# Altium PCB Nav_PCB2.PcbDoc (part 1 of 2)
Units mil, origin at the board's own origin, x right, y up, seen from the top; angles counter-clockwise.
Board outline 7310 x 3950 mil, 2 copper layers (Top Layer, Bottom Layer); 182 components, 113 nets, 524 pads, 79 vias.
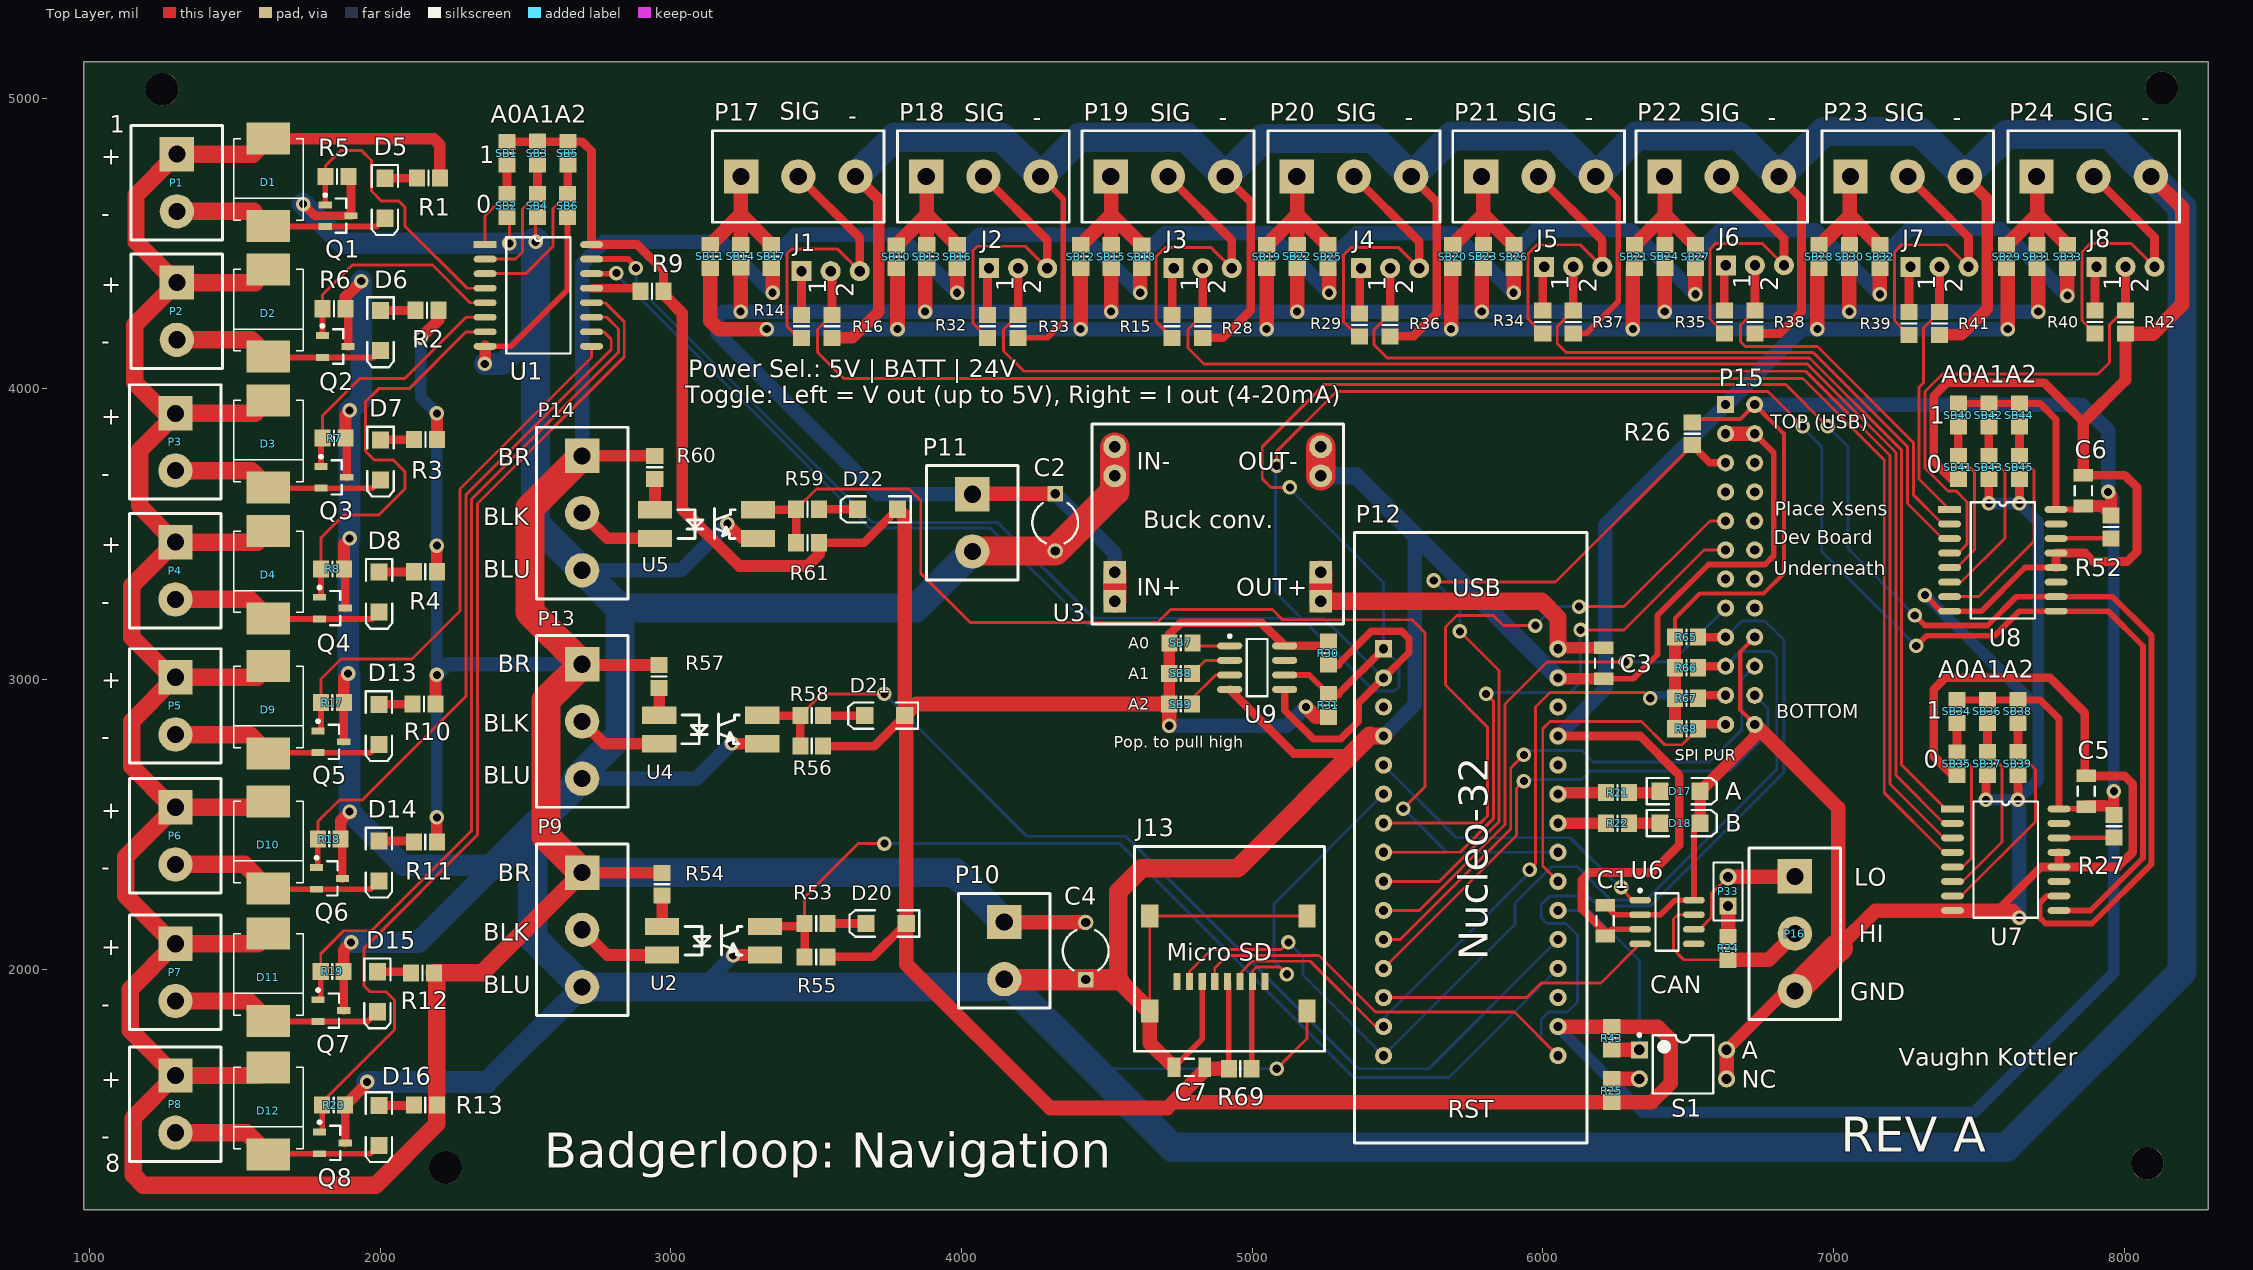
[diagram p0: Top Layer view]
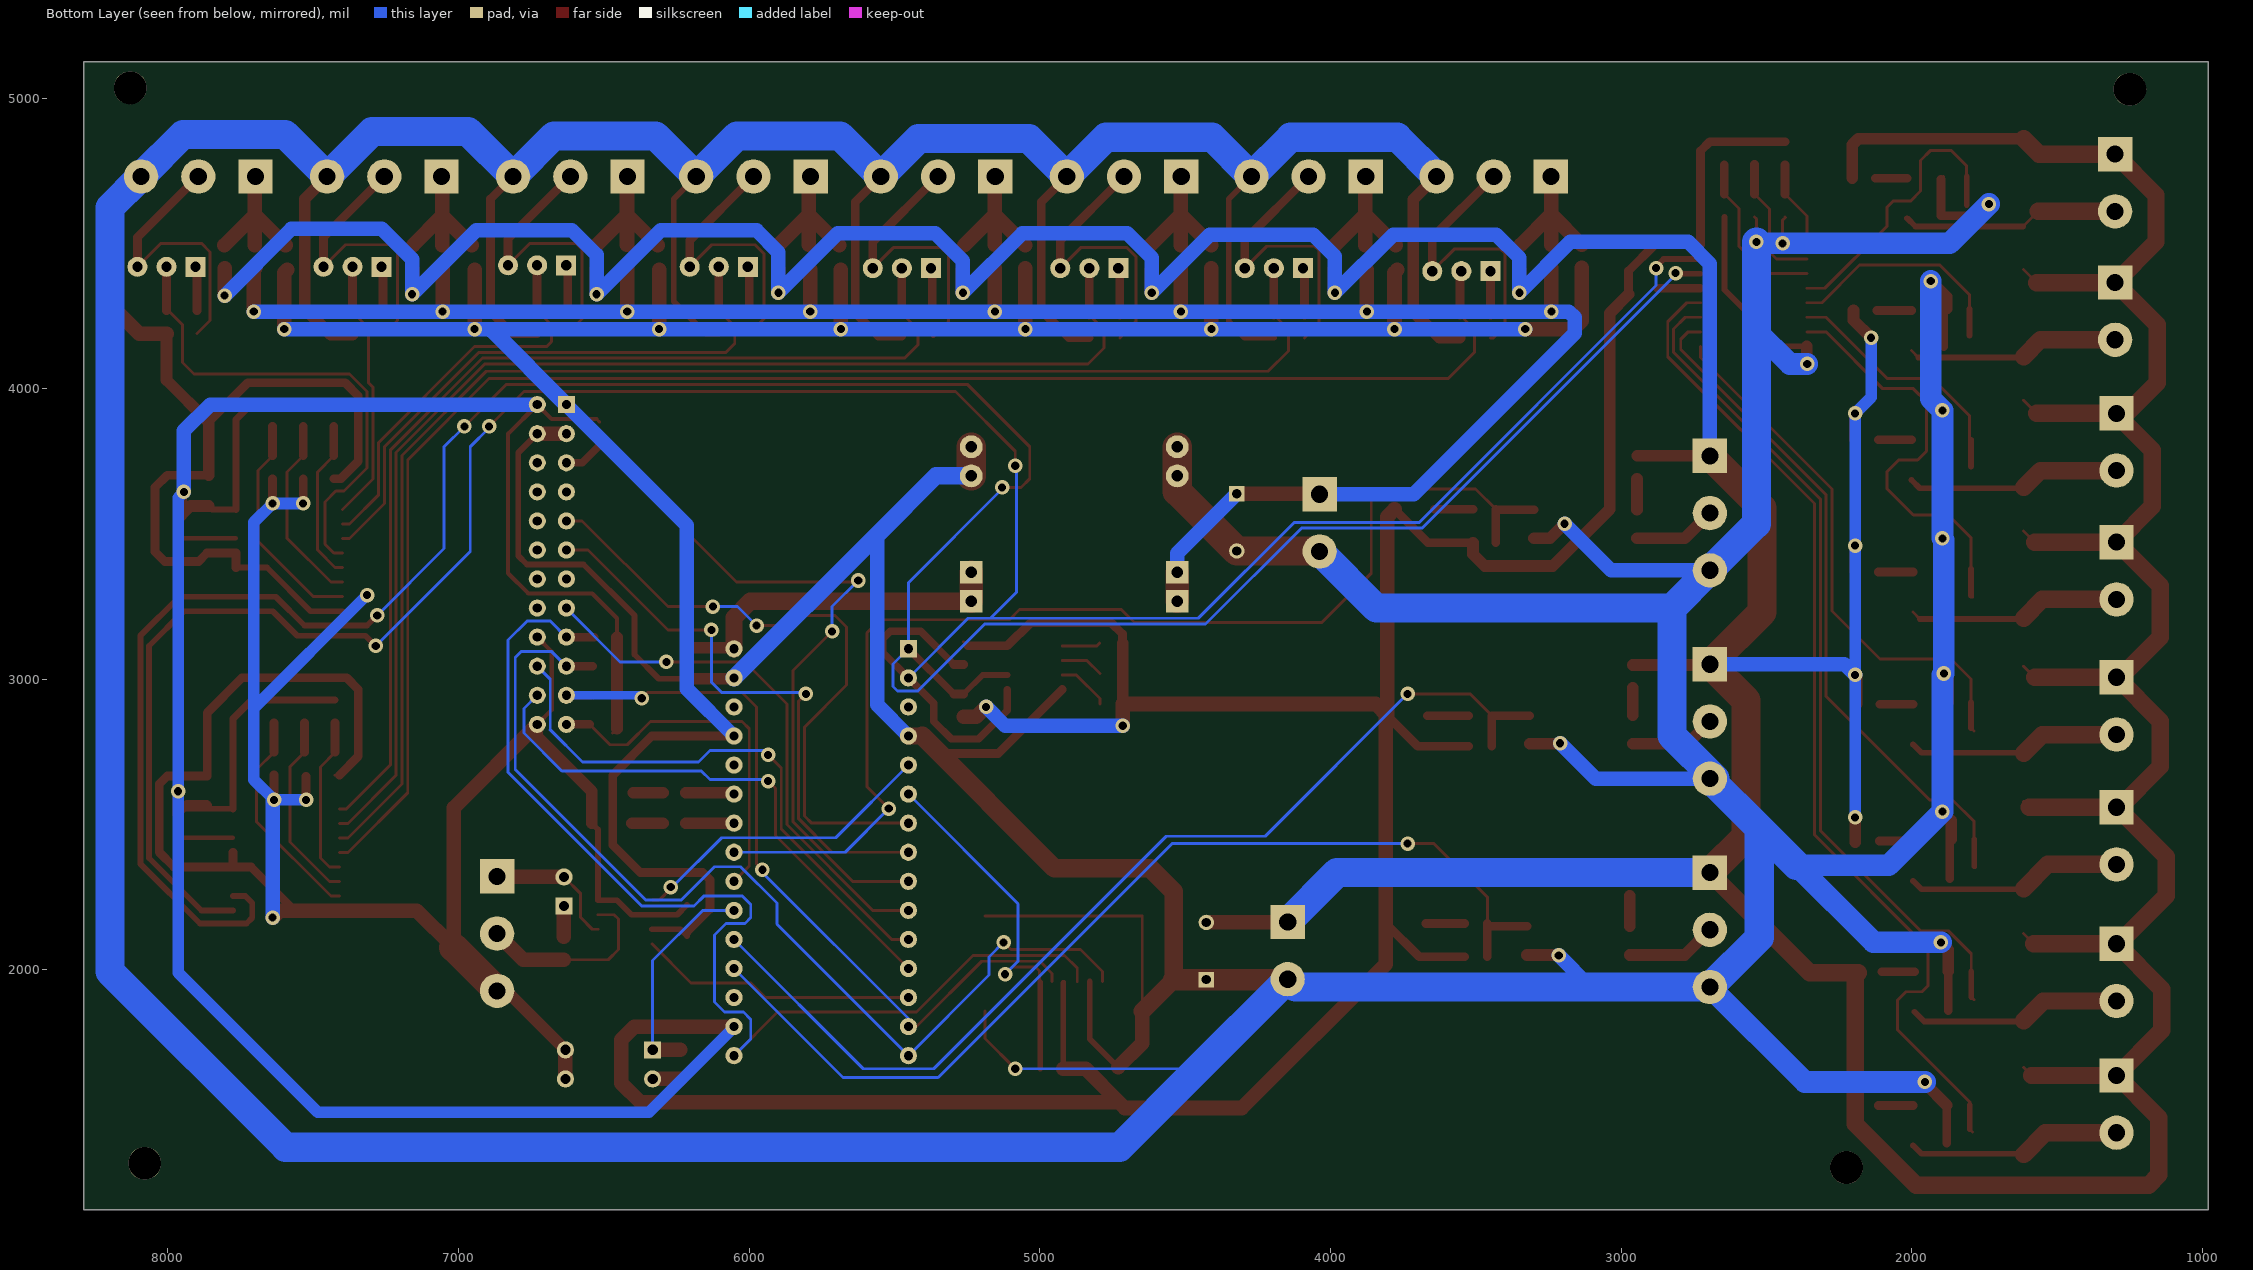
[diagram p1: Bottom Layer view, seen from below]

## Layer stack, top to bottom
Top Solder: solder mask 0.4, Solder Resist, Dk 3.5
Top Layer: signal copper 1.4
Dielectric 1: dielectric 12.6, FR-4, Dk 4.8
Bottom Layer: signal copper 1.4
Bottom Solder: solder mask 0.4, Solder Resist, Dk 3.5

## Board outline
980,1175 8290,1175 8290,5125 980,5125

## Design rules (kind name [scope] priority, off if disabled: settings)
Clearance [All] p1: gap=10 ignorepadtopadclearanceinfootprint=FALSE except(0: Arc-Hole Track-Hole SMDPad-Hole THPad-Hole Via-Hole Fill-Hole Poly-Hole Region-Hole Text-Hole)
HoleSize [All] p1: absolutevalues=TRUE maxlimit=200 minlimit=1 maxpercent=80.000 minpercent=20.000
PolygonConnect [All] p1: connectstyle=Relief reliefconductorwidth=10 reliefentries=4 polygonreliefangle="90 Angle" airgapwidth=10
RoomDefinition Nav_Ducer_IO [InComponentClass('Nav_Ducer_IO')] p1: confinementstyle=ConfineIn formatcopy=TRUE lockcomponents=FALSE outline 3040,3904.37 8215,3904.37 8215,5004.37 3040,5004.37
RoomDefinition Nav_Solenoid_IO [InComponentClass('Nav_Solenoid_IO')] p2: confinementstyle=ConfineIn formatcopy=TRUE lockcomponents=FALSE outline 1000,1220 3040.63,1220 3040.63,5000 1000,5000
RoomDefinition Nav_Retro_IO [InComponentClass('Nav_Retro_IO')] p3: confinementstyle=ConfineIn formatcopy=TRUE lockcomponents=FALSE outline 2325,1811.57 3880,1811.57 3880,3985 2325,3985
RoomDefinition Nav_MCU_IO [InComponentClass('Nav_MCU_IO')] p4: confinementstyle=ConfineIn formatcopy=TRUE lockcomponents=FALSE outline 3789.37,1395 7364.37,1395 7364.37,4115 3789.37,4115
RoomDefinition Nav_Ducer_ADC [InComponentClass('Nav_Ducer_ADC')] p5: confinementstyle=ConfineIn formatcopy=TRUE lockcomponents=FALSE outline 7295,2054.37 8025,2054.37 8025,4104.37 7295,4104.37
RoutingVias [All] p1: holewidth=28 width=50 viastyle="Through Hole" minholewidth=28 minwidth=50 maxholewidth=28 maxwidth=50
SilkToSolderMaskClearance [IsPad] p1: minsilkscreentomaskgap=5 clearancetoexposedcopper=TRUE
SolderMaskExpansion [All] p1: expansion=4
Width [All] p1: maxlimit=100 minlimit=10 preferedwidth=10 minimp=50.000000 maximp=50.000000 favimp=50.000000
28 further rules are at their usual default settings.

## Classes and differential pairs
component class Nav_Solenoid_IO: D1 D2 D3 D4 D5 D6 D7 D8 D9 D10 D11 D12 D13 D14 D15 D16 P1 P2 P3 P4 P5 P6 P7 P8 Q1 Q2 Q3 Q4 Q5 Q6 Q7 Q8 R1 R2 R3 R4 R5 R6 R7 R8 R9 R10 R11 R12 R13 R17 R18 R19 R20 SB1 SB2 SB3 SB4 SB5 SB6 U1
component class Nav_Retro_IO: D20 D21 D22 P9 P13 P14 R53 R54 R55 R56 R57 R58 R59 R60 R61 U2 U4 U5
component class Nav_MCU_IO: C1 C2 C3 C4 C7 D17 D18 J13 P10 P11 P12 P15 P16 P33 R21 R22 R24 R25 R26 R30 R31 R43 R65 R66 R67 R68 R69 S1 SB7 SB8 SB9 U3 U6 U9
component class Nav_Ducer_IO: J1 J2 J3 J4 J5 J6 J7 J8 P17 P18 P19 P20 P21 P22 P23 P24 R14 R15 R16 R28 R29 R32 R33 R34 R35 R36 R37 R38 R39 R40 R41 R42 SB10 SB11 SB12 SB13 SB14 SB15 SB16 SB17 SB18 SB19 SB20 SB21 SB22 SB23 SB24 SB25 SB26 SB27 SB28 SB29 SB30 SB31 SB32 SB33
component class Nav_Ducer_ADC: C5 C6 R27 R52 SB34 SB35 SB36 SB37 SB38 SB39 SB40 SB41 SB42 SB43 SB44 SB45 U7 U8

## Components (designator, comment, footprint, x,y, rotation, side; value= is the part's Value field where it differs from the comment)
C1 "Cap" C1206 6214.37,2170 r270 top value=10uF
C2 "Cap" CAPR5-4X5 4322.52,3540 r270 top value=220uF
C3 "Cap" C1206 6209.37,3055 r90 top value=10uF
C4 "Cap" CAPR5-4X5 4427.52,2065 r90 top value=220uF
C5 "Cap" C1206 7870,2615 r270 top value=10uF
C6 "Cap" C1206 7860,3649.37 r270 top value=10uF
C7 "Cap" C1206 4784.37,1665 r0 top value=10uF
D1 "Diode" DIODE_SMC 1615.63,4710 r90 top
D2 "Diode" DIODE_SMC 1615.63,4260 r90 top
D3 "Diode" DIODE_SMC 1615.63,3810 r90 top
D4 "Diode" DIODE_SMC 1615.63,3360 r90 top
D5 "LED2" 3.2X1.6X1.1 2016.26,4655 r270 top
D6 "LED2" 3.2X1.6X1.1 2001.26,4200 r270 top
D7 "LED2" 3.2X1.6X1.1 2001.26,3755 r270 top
D8 "LED2" 3.2X1.6X1.1 1996.26,3300 r270 top
D9 "Diode" DIODE_SMC 1615.63,2895 r90 top
D10 "Diode" DIODE_SMC 1615.63,2430 r90 top
D11 "Diode" DIODE_SMC 1615.63,1975 r90 top
D12 "Diode" DIODE_SMC 1615.63,1515 r90 top
D13 "LED2" 3.2X1.6X1.1 1995.63,2845 r270 top
D14 "LED2" 3.2X1.6X1.1 1995.63,2375 r270 top
D15 "LED2" 3.2X1.6X1.1 1990.63,1925 r270 top
D16 "LED2" 3.2X1.6X1.1 1995.63,1465 r270 top
D17 "LED2" 3.2X1.6X1.1 6472.52,2615 r0 top
D18 "LED2" 3.2X1.6X1.1 6472.52,2505 r0 top
D20 "LED2" 3.2X1.6X1.1 3741.1,2160 r180 top
D21 "LED2" 3.2X1.6X1.1 3736.1,2875 r180 top
D22 "LED2" 3.2X1.6X1.1 3711.1,3585 r180 top
J1 "SINGLE_SEL" SEL 3450,4404.37 r90 top
J2 "SINGLE_SEL" SEL 4095,4414.37 r90 top
J3 "SINGLE_SEL" SEL 4730,4414.37 r90 top
J4 "SINGLE_SEL" SEL 5375,4414.37 r90 top
J5 "SINGLE_SEL" SEL 6005,4419.37 r90 top
J6 "SINGLE_SEL" SEL 6630,4424.37 r90 top
J7 "SINGLE_SEL" SEL 7265,4419.37 r90 top
J8 "SINGLE_SEL" SEL 7905,4419.37 r90 top
J13 "uSD" MICRO_SD_HOLDER 4741.73,1960.59 r0 top
P1 "Header 2" "2POS TERM BLOCK" 1300.63,4806.85 r270 top
P2 "Header 2" "2POS TERM BLOCK" 1300.63,4365 r270 top
P3 "Header 2" "2POS TERM BLOCK" 1295.63,3915 r270 top
P4 "Header 2" "2POS TERM BLOCK" 1295.63,3471.85 r270 top
P5 "Header 2" "2POS TERM BLOCK" 1295.63,3006.85 r270 top
P6 "Header 2" "2POS TERM BLOCK" 1295.63,2560 r270 top
P7 "Header 2" "2POS TERM BLOCK" 1295.63,2090 r270 top
P8 "Header 2" "2POS TERM BLOCK" 1295.63,1636.85 r270 top
P9 "QMIC-0N-0A" "3POS TERM BLOCK" 2695,2335 r270 top
P10 "24V" "2POS TERM BLOCK" 4147.52,2165 r270 top
P11 "V_BATT" "2POS TERM BLOCK" 4037.52,3636.85 r270 top
P12 "NUCLEO-L432KC" NUCLEO-32 5452.52,3105 r0 top
P13 "QMIC-0N-0A" "3POS TERM BLOCK" 2695,3051.85 r270 top
P14 "QMIC-0N-0A" "3POS TERM BLOCK" 2695,3768.7 r270 top
P15 "Xsens MTi-3" Xsens 6629.37,3945 r0 top
P16 "CAN" "3POS TERM BLOCK" 6867.52,2321.85 r270 top
P17 "PRESSURE DUCER" "3POS TERM BLOCK" 3241.93,4730 r0 top
P18 "PRESSURE DUCER" "3POS TERM BLOCK" 3878.78,4730 r0 top
P19 "PRESSURE DUCER" "3POS TERM BLOCK" 4513.78,4730 r0 top
P20 "PRESSURE DUCER" "3POS TERM BLOCK" 5153.78,4730 r0 top
P21 "PRESSURE DUCER" "3POS TERM BLOCK" 5788.78,4730 r0 top
P22 "PRESSURE DUCER" "3POS TERM BLOCK" 6418.78,4730 r0 top
P23 "PRESSURE DUCER" "3POS TERM BLOCK" 7058.78,4730 r0 top
P24 "PRESSURE DUCER" "3POS TERM BLOCK" 7698.78,4730 r0 top
P33 "TERM" HDR1X2 6637.52,2220 r90 top
Q1 "MOSFET-N" SOT-23_N 1855.63,4595 r0 top
Q2 "MOSFET-N" SOT-23_N 1845.63,4145 r0 top
Q3 "MOSFET-N" SOT-23_N 1840.63,3695 r0 top
Q4 "MOSFET-N" SOT-23_N 1835.63,3245 r0 top
Q5 "MOSFET-N" SOT-23_N 1830.63,2785 r0 top
Q6 "MOSFET-N" SOT-23_N 1825.63,2315 r0 top
Q7 "MOSFET-N" SOT-23_N 1830.63,1860 r0 top
Q8 "MOSFET-N" SOT-23_N 1835.63,1405 r0 top
R1 "Res1" 6-0805_M 2166.26,4725 r0 top value=220
R2 "Res1" 6-0805_M 2161.26,4270 r0 top value=220
R3 "Res1" 6-0805_M 2156.26,3825 r0 top value=220
R4 "Res1" 6-0805_M 2155.63,3370 r0 top value=220
R5 "Res1" 6-0805_M 1851.26,4730 r180 top value=10K
R6 "Res1" 6-0805_M 1841.26,4275 r180 top value=10K
R7 "Res1" 6-0805_M 1841.26,3830 r180 top value=10K
R8 "Res1" 6-0805_M 1836.26,3380 r180 top value=10K
R9 "Res1" 6-0805_M 2935,4335 r0 top value=10K
R10 "Res1" 6-0805_M 2150.63,2915 r0 top value=220
R11 "Res1" 6-0805_M 2155.63,2440 r0 top value=220
R12 "Res1" 6-0805_M 2145.63,1990 r0 top value=220
R13 "Res1" 6-0805_M 2155.63,1535 r0 top value=220
R14 "Res1" 6-0805_M 3450,4214.37 r270 top value=100
R15 "Res1" 6-0805_M 4725,4214.37 r270 top value=100
R16 "Res1" 6-0805_M 3555,4214.37 r90 top value=150
R17 "Res1" 6-0805_M 1835.63,2920 r180 top value=10K
R18 "Res1" 6-0805_M 1825,2450 r180 top value=10K
R19 "Res1" 6-0805_M 1835,1995 r180 top value=10K
R20 "Res1" 6-0805_M 1840,1535 r180 top value=10K
R21 "Res1" 6-0805_M 6257.52,2610 r180 top value=220
R22 "Res1" 6-0805_M 6257.52,2505 r180 top value=220
R24 "Res1" 6-0805_M 6637.52,2074.37 r270 top value=120
R25 "Res1" 6-0805_M 6237.52,1585 r270 top value=10K
R26 "Res1" 6-0805_M 6514.37,3845 r90 top value=10K
R27 "Res1" 6-0805_M 7965,2494.37 r270 top value=10K
R28 "Res1" 6-0805_M 4830,4214.37 r90 top value=150
R29 "Res1" 6-0805_M 5370,4219.37 r270 top value=100
R30 "Res1" 6-0805_M 5262.52,3090 r90 top value=1K
R31 "Res1" 6-0805_M 5262.52,2910 r270 top value=1K
R32 "Res1" 6-0805_M 4090,4214.37 r270 top value=100
R33 "Res1" 6-0805_M 4195,4214.37 r90 top value=150
R34 "Res1" 6-0805_M 6000,4229.37 r270 top value=100
R35 "Res1" 6-0805_M 6625,4229.37 r270 top value=100
R36 "Res1" 6-0805_M 5475,4219.37 r90 top value=150
R37 "Res1" 6-0805_M 6105,4229.37 r90 top value=150
R38 "Res1" 6-0805_M 6730,4229.37 r90 top value=150
R39 "Res1" 6-0805_M 7260,4224.37 r270 top value=100
R40 "Res1" 6-0805_M 7900,4229.37 r270 top value=100
R41 "Res1" 6-0805_M 7365,4224.37 r90 top value=150
R42 "Res1" 6-0805_M 8005,4228.74 r90 top value=150
R43 "Res1" 6-0805_M 6237.52,1765 r90 top value=10K
R52 "Res1" 6-0805_M 7955,3524.37 r270 top value=10K
R53 "Res1" 6-0805_M 3500,2160 r0 top value=220
R54 "Res1" 6-0805_M 2970,2295 r270 top value=1K
R55 "Res1" 6-0805_M 3500,2045 r0 top value=10K
R56 "Res1" 6-0805_M 3485,2875 r0 top value=220
R57 "Res1" 6-0805_M 2960,3010 r270 top value=1K
R58 "Res1" 6-0805_M 3485,2770 r0 top value=10K
R59 "Res1" 6-0805_M 3470.63,3585 r0 top value=220
R60 "Res1" 6-0805_M 2945,3729.37 r270 top value=1K
R61 "Res1" 6-0805_M 3470.63,3470 r0 top value=10K
R65 "Res1" 6-0805_M 6494.37,3145 r0 top value=47K
R66 "Res1" 6-0805_M 6494.37,3040 r0 top value=47K
R67 "Res1" 6-0805_M 6494.37,2935 r0 top value=47K
R68 "Res1" 6-0805_M 6494.37,2830 r0 top value=47K
R69 "Res1" 6-0805_M 4959.37,1660 r0 top value=10K
S1 "SW DIP-2" DIP-4 6482.52,1675 r0 top
SB1 "Res1" 6-0805_M 2436.26,4810 r90 top value=0
SB2 "Res1" 6-0805_M 2436.26,4630 r90 top value=0
SB3 "Res1" 6-0805_M 2541.26,4810.63 r90 top value=0
SB4 "Res1" 6-0805_M 2541.26,4630 r90 top value=0
SB5 "Res1" 6-0805_M 2646.26,4810 r90 top value=0
SB6 "Res1" 6-0805_M 2645,4630 r90 top value=0
SB7 "Res1" 6-0805_M 4755,3125 r180 top value=0
SB8 "Res1" 6-0805_M 4754.37,3020 r180 top value=0
SB9 "Res1" 6-0805_M 4754.37,2915 r180 top value=0
SB10 "Res1" 6-0805_M 3775.63,4453.74 r90 top value=0
SB11 "Res1" 6-0805_M 3135.63,4455 r90 top value=0
SB12 "Res1" 6-0805_M 4410.63,4454.37 r90 top value=0
SB13 "Res1" 6-0805_M 3880.63,4454.37 r90 top value=0
SB14 "Res1" 6-0805_M 3240.63,4455.63 r90 top value=0
SB15 "Res1" 6-0805_M 4515.63,4454.37 r90 top value=0
SB16 "Res1" 6-0805_M 3985.63,4454.37 r90 top value=0
SB17 "Res1" 6-0805_M 3345.63,4455 r90 top value=0
SB18 "Res1" 6-0805_M 4620.63,4453.74 r90 top value=0
SB19 "Res1" 6-0805_M 5050.63,4454.37 r90 top value=0
SB20 "Res1" 6-0805_M 5690.63,4454.37 r90 top value=0
SB21 "Res1" 6-0805_M 6315.63,4454.37 r90 top value=0
SB22 "Res1" 6-0805_M 5155.63,4455 r90 top value=0
SB23 "Res1" 6-0805_M 5795.63,4455 r90 top value=0
SB24 "Res1" 6-0805_M 6420.63,4455 r90 top value=0
SB25 "Res1" 6-0805_M 5260.63,4454.37 r90 top value=0
SB26 "Res1" 6-0805_M 5900.63,4454.37 r90 top value=0
SB27 "Res1" 6-0805_M 6525.63,4454.37 r90 top value=0
SB28 "Res1" 6-0805_M 6950.63,4454.37 r90 top value=0
SB29 "Res1" 6-0805_M 7595.63,4454.37 r90 top value=0
SB30 "Res1" 6-0805_M 7055.63,4454.37 r90 top value=0
SB31 "Res1" 6-0805_M 7700.63,4454.37 r90 top value=0
SB32 "Res1" 6-0805_M 7160.63,4454.37 r90 top value=0
SB33 "Res1" 6-0805_M 7805.63,4454.37 r90 top value=0
SB34 "Res1" 6-0805_M 7425,2889.37 r90 top value=0
SB35 "Res1" 6-0805_M 7425,2709.37 r90 top value=0
SB36 "Res1" 6-0805_M 7530,2889.37 r90 top value=0
SB37 "Res1" 6-0805_M 7530,2710 r90 top value=0
SB38 "Res1" 6-0805_M 7635,2889.37 r90 top value=0
SB39 "Res1" 6-0805_M 7635,2710 r90 top value=0
SB40 "Res1" 6-0805_M 7430,3909.37 r90 top value=0
SB41 "Res1" 6-0805_M 7430,3729.37 r90 top value=0
SB42 "Res1" 6-0805_M 7535,3909.37 r90 top value=0
SB43 "Res1" 6-0805_M 7535,3729.37 r90 top value=0
SB44 "Res1" 6-0805_M 7640,3909.37 r90 top value=0
SB45 "Res1" 6-0805_M 7640,3729.37 r90 top value=0
U1 "PCF8574" 16-SOIC 2361.26,4495.63 r0 top
U2 "TPC817" 4-SOP 2970,2150 r0 top
U3 "MP1584EN Breakout Board" "MP1584EN Breakout" 4527.52,3800 r0 top
U4 "TPC817" 4-SOP 2960,2876.57 r0 top
U5 "TPC817" 4-SOP 2945.67,3583.43 r0 top
U6 "MCP2561" SO8_L 6427.52,2165 r0 top
U7 "PCF8591" 16-SOIC 7410,2554.37 r0 top
U8 "PCF8591" 16-SOIC 7400,3584.37 r0 top
U9 "CAT24C32" SO8_N 5017.52,3040 r0 top

## Footprints (in the part's own frame and the unit in brackets; to place one, negate y for a bottom-side part, rotate by r counter-clockwise, add the part's x,y. Pads: shape width x height; smd on the part's side, far side on the other; paste and mask are expansions set on the pad)
"2POS TERM BLOCK" [mm] "5mm Pitch"
  rect 3x3 hole 1.5: 1(0,0)
  round 3 hole 1.5: 2(5,0)
  silkscreen extent -2.5,-4 7.5,4, body extent -2.51,-4.57 8.09,4.43, height 12.6
3.2X1.6X1.1 [mm] "SMT LED; 2 Flat Leads"
  rect 1.5x1.5 smd: 1(-1.75,0) 2(1.75,0)
  silkscreen extent -2.9,-1.15 3.2,1.15
"3POS TERM BLOCK" [mm] "5mm Pitch"
  rect 3x3 hole 1.5: 1(0,0)
  round 3 hole 1.5: 2(5,0) 3(10,0)
  silkscreen extent -2.5,-4 12.5,4
4-SOP [mm] "TPC817"
  rect 3x1.5 smd: 1(0,0) 2(0,-2.5) 3(9,0) 4(9,-2.5)
  silkscreen extent 2,-2.5 7,0.1
6-0805_M [mm] "Chip Resistor, Body 2.0x1.2mm, IPC Low Density"
  rect 1.4x1.5 smd: 1(-1,0) 2(1,0)
  silkscreen extent 0,-0.65 0,0.65, body extent -1.07,-0.7 1.07,0.7, height 0.7
16-SOIC [mm]
  rect 2x0.6 smd: 1(0,0)
  oval 2x0.6 smd: 2(0,-1.27) 3(0,-2.54) 4(0,-3.81) 5(0,-5.08) 6(0,-6.35) 7(0,-7.62) 8(0,-8.89) 9(9.3,-8.89) 10(9.3,-7.62) 11(9.3,-6.35) 12(9.3,-5.08) 13(9.3,-3.81) 14(9.3,-2.54) 15(9.3,-1.27) 16(9.3,0)
  silkscreen extent 1.84,-9.53 7.46,0.64
C1206 [mm] "Chip Capacitor, Body 3.2x1.6mm, IPC High Density"
  rect 1.1x1.7 smd: 1(-1.35,0) 2(1.35,0)
  silkscreen extent -0.4,-0.75 0.4,0.75, body extent -1.7,-0.9 1.7,0.9, height 1.3
CAPR5-4X5 [mm] "Capacitor; 2 Leads"
  rect 1.35x1.35 hole 0.8: 1(-2.5,0)
  round 1.35 hole 0.8: 2(2.5,0)
  silkscreen extent -1.69,-2 1.82,2
DIODE_SMC [mil] "Diode; 2 Leads"
  rect 110x150 smd: 1(-150,0) 2(150,0)
  silkscreen extent -130,-120 150,120
DIP-4 [mm] "DIP; 4 Leads; Row Spacing 7.62 mm; Pitch 2.54 mm"
  rect 1.5x1.5 hole 0.9: 1(-3.81,1.27)
  round 1.5 hole 0.9: 2(-3.81,-1.27) 3(3.81,-1.27) 4(3.81,1.27)
  silkscreen extent -3.93,-2.55 2.65,2.69, body extent -3.15,-2.5 3.15,2.5, height 5.6
HDR1X2 [mm] "Connector; Header; 2 Position"
  rect 1.5x1.5 hole 0.9: 1(0,0)
  round 1.5 hole 0.9: 2(2.54,0)
  silkscreen extent -1.27,-1.27 3.81,1.27
MICRO_SD_HOLDER [mm]
  rect 0.63x1.5 smd: 1(7.7,0) 2(6.6,0) 3(5.5,0) 4(4.4,0) 5(3.3,0) 6(2.2,0) 7(1.1,0) 8(0,0)
  rect 1.5x2 smd: 9(-2.38,-2.6) 9(-2.38,5.7) 9(11.37,-2.6) 9(11.37,5.7)
  silkscreen extent -3.7,-6.1 12.9,11.8
"MP1584EN Breakout" [mm] "Buck Converter"
  round 2 hole 1: 0(0,-2.54) 0(0,0) 2(18,-2.54) 2(18,0)
  rect 2x2 hole 1: 1(0,-13.5) 1(0,-10.96) 3(18,-13.5) 3(18,-10.96)
  silkscreen extent -2,-15.5 20,2
NUCLEO-32 [mm]
  rect 1.5x1.5 hole 0.8: 1(0,0)
  round 1.5 hole 0.8: 2(0,-2.54) 3(0,-5.08) 4(0,-7.62) 5(0,-10.16) 6(0,-12.7) 7(0,-15.24) 8(0,-17.78) 9(0,-20.32) 10(0,-22.86) 11(0,-25.4) 12(0,-27.94) 13(0,-30.48) 14(0,-33.02) 15(0,-35.56) 16(15.24,-35.56) 17(15.24,-33.02) 18(15.24,-30.48) 19(15.24,-27.94) 20(15.24,-25.4) 21(15.24,-22.86) 22(15.24,-20.32) 23(15.24,-17.78) 24(15.24,-15.24) 25(15.24,-12.7) 26(15.24,-10.16) 27(15.24,-7.62) 28(15.24,-5.08) 29(15.24,-2.54) 30(15.24,0)
  silkscreen extent -2.54,-43.18 17.78,10.16
SEL [mm]
  rect 1.75x1.75 hole 0.9: 1(0,0)
  round 1.75 hole 0.9: 2(0,-2.54) 3(0,-5.08)
SO8_L [mm] "SOIC, 8-Leads, Body 4.9x3.9mm, Pitch 1.27mm, IPC High Density"
  oval 1.9x0.6 smd: 1(-2.35,1.905) 2(-2.35,0.635) 3(-2.35,-0.635) 4(-2.35,-1.905) 5(2.35,-1.905) 6(2.35,-0.635) 7(2.35,0.635) 8(2.35,1.905)
  silkscreen extent -2.47,-2.5 1,2.88, body extent -2,-2.5 2,2.5, height 1.75
SO8_N [mm] "SOIC, 8-Leads, Body 4.9x3.9mm, Pitch 1.27mm, IPC Medium Density"
  oval 2.2x0.6 smd: 1(-2.4,1.905) 2(-2.4,0.635) 3(-2.4,-0.635) 4(-2.4,-1.905) 5(2.4,-1.905) 6(2.4,-0.635) 7(2.4,0.635) 8(2.4,1.905)
  silkscreen extent -2.52,-2.5 0.9,2.88, body extent -2,-2.5 2,2.5, height 1.75
SOT-23_N [mm] "SOT23, 3-Leads, Body 2.9x1.3mm, Pitch 0.95mm, Lead Span 2.5mm, IPC Medium Density"
  rect 1.15x0.6 smd: 1(-1.125,0.95) 2(-1.125,-0.95) 3(1.125,0)
  silkscreen extent -1.25,-1.5 0.7,1.92, body extent -0.7,-1.5 0.7,1.5, height 1.1
Xsens [mm]
  rect 1.5x1.5 hole 0.8: 1(0,0)
  round 1.5 hole 0.8: 2(2.54,0) 3(0,-2.54) 4(2.54,-2.54) 5(0,-5.08) 6(2.54,-5.08) 7(0,-7.62) 8(2.54,-7.62) 9(0,-10.16) 10(2.54,-10.16) 11(0,-12.7) 12(2.54,-12.7) 13(0,-15.24) 14(2.54,-15.24) 15(0,-17.78) 16(2.54,-17.78) 17(0,-20.32) 18(2.54,-20.32) 19(0,-22.86) 20(2.54,-22.86) 21(0,-25.4) 22(2.54,-25.4) 23(0,-27.94) 24(2.54,-27.94)

## Part data
C1 C2 C3 C4 C5 C6 C7: "Capacitor", LatestRevisionDate=17-Jul-2002, LatestRevisionNote="Re-released for DXP Platform.", PackageDescription="Radial Cap, Thru-Hole; 2 Leads; 0.3 in Pin Spacing", PackageReference=RAD-0.3, Published=8-Jun-2000, Publisher="Altium Limited"
D1 D2 D3 D4 D9 D10 D11 D12: "Default Diode", Code_JEDEC=DO-214-AB, LatestRevisionDate=17-Jul-2002, LatestRevisionNote="Re-released for DXP Platform.", PackageDescription="DO-214-AB/SMC; 2 C-Bend Leads; Body 7.9 x 5.9 mm, inc. leads (LxW)", PackageReference=SMC, PackageVersion=Sep-1996, Published=8-Jun-2000, Publisher="Altium Limited"
D5 D6 D7 D8 D13 D14 D15 D16 D17 D18 D20 D21 D22: "Typical RED, GREEN, YELLOW, AMBER GaAs LED", LatestRevisionDate=17-Jul-2002, LatestRevisionNote="Re-released for DXP Platform.", PackageDescription="SM LED; 2 Flat Leads", PackageReference=3.2X1.6X1.1, PackageVersion=Feb-2002, Published=8-Jun-2000, Publisher="Altium Limited"
J13: library part "SD Card"
P1 P2 P3 P4 P5 P6 P7 P8: "Header, 2-Pin", LatestRevisionDate=17-Jul-2002, LatestRevisionNote="Re-released for DXP Platform.", Publisher="Altium Limited"
P9 P13 P14: "Retroreflective Sensor", ComponentLink1Description=Sensor, ComponentLink1URL=https://www.automationdirect.com/adc/Shopping/Catalog/Sensors_-z-_Encoders/Photoelectric_Sensors/DC_Rectangular/Retroreflective_(QM-z-CX-z-FE_Series)/QMIC-0N-0A, ComponentLink2Description=Datasheet, ComponentLink2URL=https://cdn.automationdirect.com/static/specs/peminirectqm.pdf
P10 P11 P33: library part "Header 2", "Header, 2-Pin", LatestRevisionDate=17-Jul-2002, LatestRevisionNote="Re-released for DXP Platform.", Publisher="Altium Limited"
P12: "STM32L432KC Development Board", ComponentLink1Description=MBED, ComponentLink1URL=https://os.mbed.com/platforms/ST-Nucleo-L432KC/, ComponentLink2Description=Digikey, ComponentLink2URL=https://www.digikey.com/products/en?keywords=NUCLEO-L432KC
P15: "IMU Development Board", ComponentLink1Description=Purchase, ComponentLink1URL=https://shop-us.xsens.com/shop/mti-1-series/mti-1-series-dk/mti-3-8a7g6-dk, ComponentLink2Description=Documentation, ComponentLink2URL=https://www.xsens.com/products/mti-1-series/
Q1 Q2 Q3 Q4 Q5 Q6 Q7 Q8: "N-Channel MOSFET", LatestRevisionDate=17-Jul-2002, LatestRevisionNote="Re-released for DXP Platform.", PackageDescription="TO, Flat Index; 3 In-Line, Axial Leads; Body Dia. 4.6mm; Lead Dia. 0.5 mm (max)", PackageReference=E3, PackageVersion=1995/1996, Published=8-Jun-2000, Publisher="Altium Limited"
R1 R2 R3 R4 R5 R6 R7 R8 R9 R10 R11 R12 R13 R14 R15 R16 R17 R18 R19 R20 R21 R22 R24 R25 R26 R27 R28 R29 R30 R31 R32 R33 R34 R35 R36 R37 R38 R39 R40 R41 R42 R43 R52 R53 R54 R55 R56 R57 R58 R59 R60 R61 R65 R66 R67 R68 R69 SB1 SB2 SB3 SB4 SB5 SB6 SB7 SB8 SB9 SB10 SB11 SB12 SB13 SB14 SB15 SB16 SB17 SB18 SB19 SB20 SB21 SB22 SB23 SB24 SB25 SB26 SB27 SB28 SB29 SB30 SB31 SB32 SB33 SB34 SB35 SB36 SB37 SB38 SB39 SB40 SB41 SB42 SB43 SB44 SB45: "Resistor", LatestRevisionDate=17-Jul-2002, LatestRevisionNote="Re-released for DXP Platform.", PackageDescription="Axial Device, Thru-Hole; 2 Leads; 0.3 in Pin Spacing", PackageReference=AXIAL-0.3, Published=8-Jun-2000, Publisher="Altium Limited"
S1: "DIP Switch, 2 Position, SPST", LatestRevisionDate=17-Jul-2002, LatestRevisionNote="Re-released for DXP Platform.", PackageReference=DIP-4, Published=24-Mar-1999, Publisher="Altium Limited"
U1: "I2C I/O Expander", ComponentLink1Description=Part, ComponentLink1URL=https://www.digikey.com/product-detail/en/texas-instruments/PCF8574DWR/296-13108-1-ND/484579, ComponentLink2Description=Datasheet, ComponentLink2URL=http://www.ti.com/lit/ds/symlink/pcf8574.pdf
U2 U4 U5: "Opto-Coupler", ComponentLink1Description=Digi-Key, ComponentLink1URL=https://www.digikey.com/product-detail/en/taiwan-semiconductor-corporation/TPC817S1D-RAG/TPC817S1D-RAGCT-ND/7359685, ComponentLink2Description=Datasheet, ComponentLink2URL=http://www.taiwansemi.com/products/datasheet/TPC817%20SERIES_C1612.pdf
U3: "Buck Converter", ComponentLink1Description=Part, ComponentLink1URL=https://www.amazon.com/eBoot-MP1584EN-Converter-Adjustable-Module/dp/B01MQGMOKI/
U6: "CAN Transciever", ComponentLink1Description=Part, ComponentLink1URL=https://www.digikey.com/product-detail/en/microchip-technology/MCP2561-E-SN/MCP2561-E-SN-ND/4079961, ComponentLink2Description=Datasheet, ComponentLink2URL=http://ww1.microchip.com/downloads/en/DeviceDoc/20005167C.pdf
U7 U8: "8-bit A/D and D/A", ComponentLink1Description=Part, ComponentLink1URL=https://www.digikey.com/product-detail/en/nxp-usa-inc/PCF8591T-2518/568-1088-1-ND/735798, ComponentLink2Description=Datasheet, ComponentLink2URL=https://www.nxp.com/docs/en/data-sheet/PCF8591.pdf
U9: "I2C EEPROM", ComponentLink1Description=Part, ComponentLink1URL=https://www.digikey.com/product-detail/en/on-semiconductor/CAT24C32WI-GT3/CAT24C32WI-GT3CT-ND/1631159, ComponentLink2Description=Datasheet, ComponentLink2URL=http://www.onsemi.com/pub/Collateral/CAT24C32-D.PDF

## Free pads (board coordinates)
  round 113 hole 113 unplated: H(1250,5030) H(2225,1320) H(8080,1335) H(8130,5035)

## Via types
v1: diameter 50, hole 28, Top Layer to Bottom Layer, 79 vias

## Nets (pads, with @x,y where several pads share a name; then routed paths per layer and width w, separated by ;. In a path a pad name is that pad's centre, name@x,y a point inside that pad or via, vN(x,y) a via of type N, cw(c..) or ccw(c..) an arc to the next point about the centre after c; other vN are vias at no path point)
3V3: C5.2 C6.2 C7.2 D20.1 D21.1 D22.1 J13.4 P12.17 P15.2 R9.2 R25.2 R26.2 R27.1 R30.2 R31.2 R43.2 R52.1 R55.2 R58.2 R61.2 R65.1 R66.1 R67.1 R68.1 R69.1 SB1.2 SB3.2 SB5.2 SB7.2 SB8.2 SB9.2 SB34.2 SB36.2 SB38.2 SB40.2 SB42.2 SB44.2 U1.16 U7.16 U8.16 U9.8 | length 20304.7
  Top Layer w10: SB3.2@2540.63,4849.37 SB3.2@2541.26,4850 ; SB5.2@2645.63,4850 SB5.2@2646.26,4849.37 ; D21.1@3805,2875 D21.1@3810,2870 ; SB7.2@4715,3124.37 SB7.2@4715.63,3125 ; J13.4@4914.96,1960.59 J13.4@4920,1955.55 ; R30.2@5248.15,3115 R30.2@5262.52,3129.37 ; P12.17@6052.52,1805 P12.17@6053.15,1804.37 ; R68.1@6455,2830 R68.1@6470,2815 ; R26.2@6514.37,3884.37 R26.2@6525.63,3895.63 ; C6.2@7848.15,3584.37 C6.2@7860,3596.22 ; C5.2@7858.15,2554.37 C5.2@7868.78,2565
  Top Layer w15: R65.1@6455,3145 6455,3210 6540,3295 6760,3295 6830,3365 6830,3844.37 P15.2@6729.37,3945 6680,3895.63 R26.2@6525.63,3895.63
  Top Layer w20: R69.1@4920,1660 J13.4@4920,1955.55 ; U8.16@7766.14,3584.37 C6.2@7848.15,3584.37 ; U7.16@7776.14,2554.37 C5.2@7858.15,2554.37 ; 7933.74,2565 R27.1@7965,2533.74
  Top Layer w25: SB34.2@7425,2928.74 SB36.2@7530,2928.74 SB38.2@7635,2928.74 7711.26,2928.74 7776.14,2863.86 U7.16@7776.14,2554.37 ; SB40.2@7430,3948.74 SB42.2@7535,3948.74 SB44.2@7640,3948.74 7711.26,3948.74 7766.14,3893.86 U8.16@7766.14,3584.37
  Top Layer w30: SB1.2@2436.26,4849.37 SB3.2@2540.63,4849.37 ; SB3.2@2541.26,4850 SB5.2@2645.63,4850 ; SB5.2@2646.26,4849.37 2695.63,4849.37 2727.4,4817.6 U1.16@2727.4,4495.63 2884.37,4495.63 2975,4405 R9.2@2975,4325 ; R61.2@3510,3470 3665,3470 D22.1@3780,3585 ; R58.2@3524.37,2770 3700,2770 D21.1@3805,2875 ; R55.2@3539.37,2045 3695,2045 D20.1@3810,2160 ; SB7.2@4715.63,3125 4715.63,3155.63 4755,3195 5032.01,3195 U9.8@5112.01,3115 R30.2@5248.15,3115
  Top Layer w40: R9.2@2975,4325 3040,4260 3040,3585 3235,3390 3470,3390 3510,3430 R61.2@3510,3470 ; SB9.2@4715,2915 SB8.2@4715,3020 SB7.2@4715,3124.37 ; R68.1@6455,2830 R67.1@6455,2935 R66.1@6455,3040 R65.1@6455,3145 ; C6.2@7860,3596.22 7922.52,3596.22 R52.1@7955,3563.74 7955,3635 v1(7945,3645) ; C5.2@7868.78,2565 7933.74,2565 ; R27.1@7965,2533.74 v1(7965,2615)
  Top Layer w50: D22.1@3780,3585 3805,3560 D21.1@3805,2875 3845,2915 SB9.2@4715,2915 v1(4715,2840) ; D21.1@3810,2870 D20.1@3810,2160 3810,2020 4305,1525 4707.52,1525 4728.15,1545.63 ; R69.1@4920,1660 4842.52,1660 4728.15,1545.63 ; v1(5185,2905) 5219.37,2870.63 R31.2@5262.52,2870.63 ; P12.17@6053.15,1804.37 R43.2@6237.52,1804.37 6395.63,1804.37 6440,1760 6440,1610 6375.63,1545.63 R25.2@6237.52,1545.63 4728.15,1545.63
  Bottom Layer w10: P12.17@6052.52,1802.48 P12.17@6052.52,1805
  Bottom Layer w40: P12.17@6052.52,1802.48 6345,1510 7485,1510 7965,1990 v1(7965,2615) 7965,3625 v1(7945,3645)
  Bottom Layer w50: v1(4715,2840) 5120,2840 v1(5185,2905) ; P15.2@6729.37,3945 7855,3945 7945,3855 v1(7945,3645)
24V+: C4.2 D1.2 D2.2 D3.2 D4.2 D9.2 D10.2 D11.2 D12.2 P1.1 P2.1 P3.1 P4.1 P5.1 P6.1 P7.1 P8.1 P9.1 P10.1 P13.1 P14.1 R1.2 R2.2 R3.2 R4.2 R10.2 R11.2 R12.2 R13.2 R54.1 R57.1 R60.1 SB16.1 SB17.1 SB18.1 SB25.1 SB26.1 SB27.1 SB32.1 SB33.1 | length 25492.7
  Top Layer w10: P3.1@1260,3915 P3.1@1295.63,3915 P3.1@1295.63,3910.63 ; P5.1@1283.15,3006.85 P5.1@1295.63,3006.85 ; P6.1@1285,2560 P6.1@1295.63,2560 ; P7.1@1290,2090 P7.1@1295.63,2090 ; D3.2@1570.63,3915 D3.2@1615.63,3960 ; D2.2@1570.63,4365 D2.2@1615.63,4410 ; D9.2@1577.48,3006.85 D9.2@1615.63,3045 ; D4.2@1577.48,3471.85 D4.2@1615.63,3510 ; D11.2@1580.63,2090 D11.2@1615.63,2125 ; D12.2@1587.48,1636.85 D12.2@1615.63,1665 ; D10.2@1595.63,2560 D10.2@1615.63,2580 ; R12.2@2185,1990 R12.2@2195,1980 ; R11.2@2185,2430 R11.2@2195,2440 ; R10.2@2190,2915 R10.2@2195,2910 ; v1@2190,3010 v1(2195,3015) ; R4.2@2190,3365 R4.2@2195,3370 ; R3.2@2195,3824.37 R3.2@2195.63,3825 ; v1(2195,3915) v1@2195.63,3914.37 ; R2.2@2195.63,4265 R2.2@2200.63,4270 ; R1.2@2200.63,4720 R1.2@2205.63,4725 ; P9.1@2695,2335 P9.1@2695.63,2334.37 ; P13.1@2695,3051.85 P13.1@2697.48,3049.37 ; P14.1@2695,3768.7 P14.1@2695,3768.7 ; SB17.1@3345.63,4415.63 SB17.1@3350,4411.26 ; SB16.1@3985,4414.37 SB16.1@3985.63,4415 ; P10.1@4147.52,2165 P10.1@4149.09,2163.43 ; SB18.1@4615,4408.74 SB18.1@4620.63,4414.37 ; SB25.1@5260.63,4415 SB25.1@5265,4410.63 ; SB26.1@5900,4414.37 SB26.1@5900.63,4415 ; SB27.1@6525,4414.37 SB27.1@6525.63,4415 ; SB32.1@7160,4414.37 SB32.1@7160.63,4415 ; SB33.1@7805,4414.37 SB33.1@7805.63,4415
  Top Layer w40: D1.2@1615.63,4860 2185,4860 2205.63,4839.37 R1.2@2205.63,4725 ; v1(2140,4175) 2200.63,4235.63 R2.2@2200.63,4270 ; R10.2@2190,2915 v1@2190,3010 ; R11.2@2195,2440 v1(2195,2525) ; R4.2@2195,3370 v1(2195,3460) ; R3.2@2195.63,3825 v1@2195.63,3914.37 ; P14.1@2695,3768.7 R60.1@2945,3768.74 ; P9.1@2695.63,2334.37 R54.1@2970,2334.37 ; P13.1@2697.48,3049.37 R57.1@2960,3049.37
  Top Layer w50: v1(3350,4330) SB17.1@3350,4411.26 ; v1(3985,4330) SB16.1@3985,4414.37 ; P10.1@4149.09,2163.43 C4.2@4427.52,2163.43 ; v1(4615,4330) SB18.1@4615,4408.74 ; v1(5265,4330) SB25.1@5265,4410.63 ; v1(5900,4330) SB26.1@5900,4414.37 ; v1(6525,4325) SB27.1@6525,4414.37 ; v1(7160,4325) SB32.1@7160,4414.37 ; v1(7805,4320) SB33.1@7805,4414.37
  Top Layer w60: P3.1@1260,3915 1155,4020 1155,4219.37 P2.1@1300.63,4365 ; P5.1@1283.15,3006.85 1145,3145 1145,3321.22 P4.1@1295.63,3471.85 ; P6.1@1285,2560 1145,2700 1145,2856.22 P5.1@1295.63,3006.85 D9.2@1577.48,3006.85 ; P7.1@1290,2090 1125,2255 1125,2389.37 P6.1@1295.63,2560 D10.2@1595.63,2560 ; P3.1@1295.63,3910.63 1172.48,3787.48 1172.48,3595 P4.1@1295.63,3471.85 ; P3.1@1295.63,3915 D3.2@1570.63,3915 ; D2.2@1570.63,4365 P2.1@1300.63,4365 ; D4.2@1577.48,3471.85 P4.1@1295.63,3471.85 ; D11.2@1580.63,2090 P7.1@1295.63,2090 1140,1934.37 1140,1792.48 P8.1@1295.63,1636.85 ; D12.2@1587.48,1636.85 P8.1@1295.63,1636.85 ; D1.2@1615.63,4860 1562.48,4806.85 P1.1@1300.63,4806.85 1160,4666.22 1160,4505.63 P2.1@1300.63,4365 ; R12.2@2185,1990 2351.26,1990 P9.1@2695.63,2334.37 ; R12.2@2195,1980 R13.2@2195,1535 2195,1470 1985,1260 1185,1260 1150,1295 1150,1491.22 P8.1@1295.63,1636.85
  Top Layer w100: P9.1@2695,2335 2570,2460 2570,2926.85 P13.1@2695,3051.85 2515,3231.85 2515,3588.7 P14.1@2695,3768.7
  Bottom Layer w40: v1(2140,4175) 2140,3970 v1(2195,3915) v1(2195,3460) v1(2195,3015) v1(2195,2525)
  Bottom Layer w50: v1(2195,3015) 2231.85,3051.85 P13.1@2695,3051.85 ; P14.1@2695,3768.7 2695,4430 2770,4505 3175,4505 v1(3350,4330) 3350,4450 3430,4530 3785,4530 v1(3985,4330) 3985,4455 4060,4530 4415,4530 v1(4615,4330) 4615,4450 4700,4535 5060,4535 v1(5265,4330) 5265,4440 5360,4535 5695,4535 v1(5900,4330) 5900,4470 5975,4545 6305,4545 v1(6525,4325) 6525,4460 6610,4545 6940,4545 v1(7160,4325) 7160,4445 7265,4550 7575,4550 v1(7805,4320)
  Bottom Layer w100: P9.1@2695,2335 3977.52,2335 P10.1@4147.52,2165
ADC1_A0: SB34.1 SB35.2 U7.5 | length 563.4
  Top Layer w10: U7.5@7410,2354.37 7444.37,2354.37 7475,2385 7475,2698.74 SB35.2@7425,2748.74
  Top Layer w30: SB35.2@7425,2748.74 SB34.1@7425,2850
ADC1_A1: SB36.1 SB37.2 U7.6 | length 656.9
  Top Layer w10: U7.6@7410,2304.37 7444.37,2304.37 7580,2440 7580,2699.37 SB37.2@7530,2749.37
  Top Layer w30: SB37.2@7530,2749.37 SB36.1@7530,2850
ADC1_A2: SB38.1 SB39.2 U7.7 | length 755.7
  Top Layer w10: U7.7@7410,2254.37 7439.37,2254.37 7695,2510 7695,2689.37 SB39.2@7635,2749.37
  Top Layer w30: SB39.2@7635,2749.37 SB38.1@7635,2850
ADC2_A0: SB40.1 SB41.2 U8.5 | length 557.9
  Top Layer w10: U8.5@7400,3384.37 7400.63,3385 7425,3385 7485,3445 7485,3713.74 SB41.2@7430,3768.74
  Top Layer w30: SB41.2@7430,3768.74 SB40.1@7430,3870
ADC2_A1: SB42.1 SB43.2 U8.6 | length 660.2
  Top Layer w10: U8.6@7400,3334.37 7439.37,3334.37 7590,3485 7590,3713.74 SB43.2@7535,3768.74
  Top Layer w30: SB43.2@7535,3768.74 SB42.1@7535,3870
ADC2_A2: SB44.1 SB45.2 U8.7 | length 784.7
  Top Layer w10: U8.7@7400,3284.37 7400.63,3285 7500,3285 7690,3475 7690,3718.74 SB45.2@7640,3768.74
  Top Layer w30: SB45.2@7640,3768.74 SB44.1@7640,3870
CAN1_RX: P12.13 U6.4 | length 959.1
  Top Layer w10: P12.13@5452.52,1905 5945,1905 5995,1955 6200,1955 U6.4@6335,2090
CAN1_TX: P12.5 U6.1 | length 1078
  Top Layer w10: v1(6270,2285) 6270,2280 6310,2240 U6.1@6335,2240
  Bottom Layer w10: P12.5@5452.52,2705 5702.52,2455 6095,2455 6265,2285 v1(6270,2285)
DUCER1: J2.2 R33.2 U7.3 | length 4926.1
  Top Layer w10: R33.2@4195,4253.74 4145,4203.74 4145,4130 4215,4060 6905,4060 7195,3770 7195,2640 7380.63,2454.37 U7.3@7410,2454.37
  Top Layer w30: R33.2@4195,4253.74 J2.2@4195,4414.37
DUCER2: J1.2 R16.2 U7.4 | length 5590.6
  Top Layer w10: J1.2@3550,4404.37 J1.2@3555,4399.37 ; R16.2@3555,4253.74 3505,4203.74 3505,4125 3595,4035 6895,4035 7175,3755 7175,2610 7380.63,2404.37 U7.4@7410,2404.37
  Top Layer w30: R16.2@3555,4253.74 J1.2@3555,4399.37
DUCER3: J3.2 R28.2 U7.2 | length 4252.8
  Top Layer w10: R28.2@4830,4253.74 4780,4203.74 4780,4140 4835,4085 6910,4085 7215,3780 7215,2670 7380.63,2504.37 U7.2@7410,2504.37
  Top Layer w30: R28.2@4830,4253.74 J3.2@4830,4414.37
DUCER4: J4.2 R36.2 U7.1 | length 3572.7
  Top Layer w10: R36.2@5475,4258.74 5420,4203.74 5420,4150 5465,4105 6918.28,4105 7235,3788.28 7235,2705 7385.63,2554.37 U7.1@7410,2554.37
  Top Layer w30: R36.2@5475,4258.74 J4.2@5475,4414.37
DUCER5: J5.2 R37.2 U8.3 | length 2029.2
  Top Layer w10: R37.2@6105,4268.74 6050,4213.74 6050,4155 6080,4125 6930,4125 7255,3800 7255,3605 7375.63,3484.37 U8.3@7400,3484.37
  Top Layer w30: R37.2@6105,4268.74 J5.2@6105,4419.37
DUCER6: J6.2 R38.2 U8.2 | length 1368.7
  Top Layer w10: R38.2@6730,4268.74 6680,4218.74 6680,4161.7 6696.7,4145 6945,4145 7275,3815 7275,3635 7375.63,3534.37 U8.2@7400,3534.37
  Top Layer w30: R38.2@6730,4268.74 J6.2@6730,4424.37
DUCER7: J7.2 R41.2 U8.1 | length 907.5
  Top Layer w10: R41.2@7365,4263.74 7310,4208.74 7310,4020 7295,4005 7295,3689.37 U8.1@7400,3584.37
  Top Layer w30: R41.2@7365,4263.74 J7.2@7365,4419.37
DUCER8: J8.2 R42.2 U8.4 | length 1706.9
  Top Layer w10: U8.4@7400,3434.37 7429.37,3434.37 7460,3465 7460,3610 7422.56,3647.44 7394.26,3647.44 7315,3726.7 7315,3990 7375,4050 7910,4050 7950,4090 7950,4220 7998.11,4268.11 R42.2@8005,4268.11
  Top Layer w30: R42.2@8005,4268.11 J8.2@8005,4419.37